# Altium PCB f103ret6_w25q64_20200910.PcbDoc
Units mm, origin at the board's own origin, x right, y up, seen from the top; angles counter-clockwise.
Board outline 50.16 x 15.89 mm, 2 copper layers (Top Layer, Bottom Layer); 41 components, 39 nets, 177 pads, 56 vias.
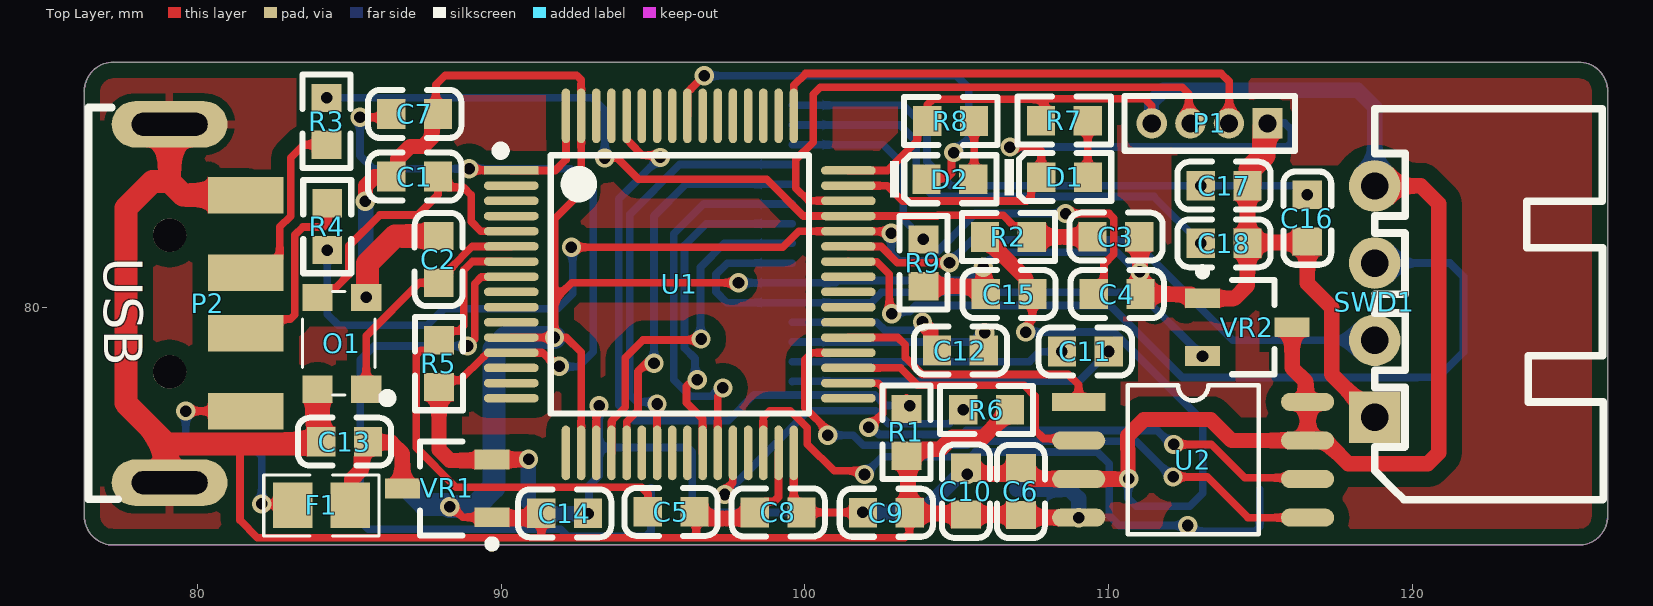
[diagram p0: Top Layer view]
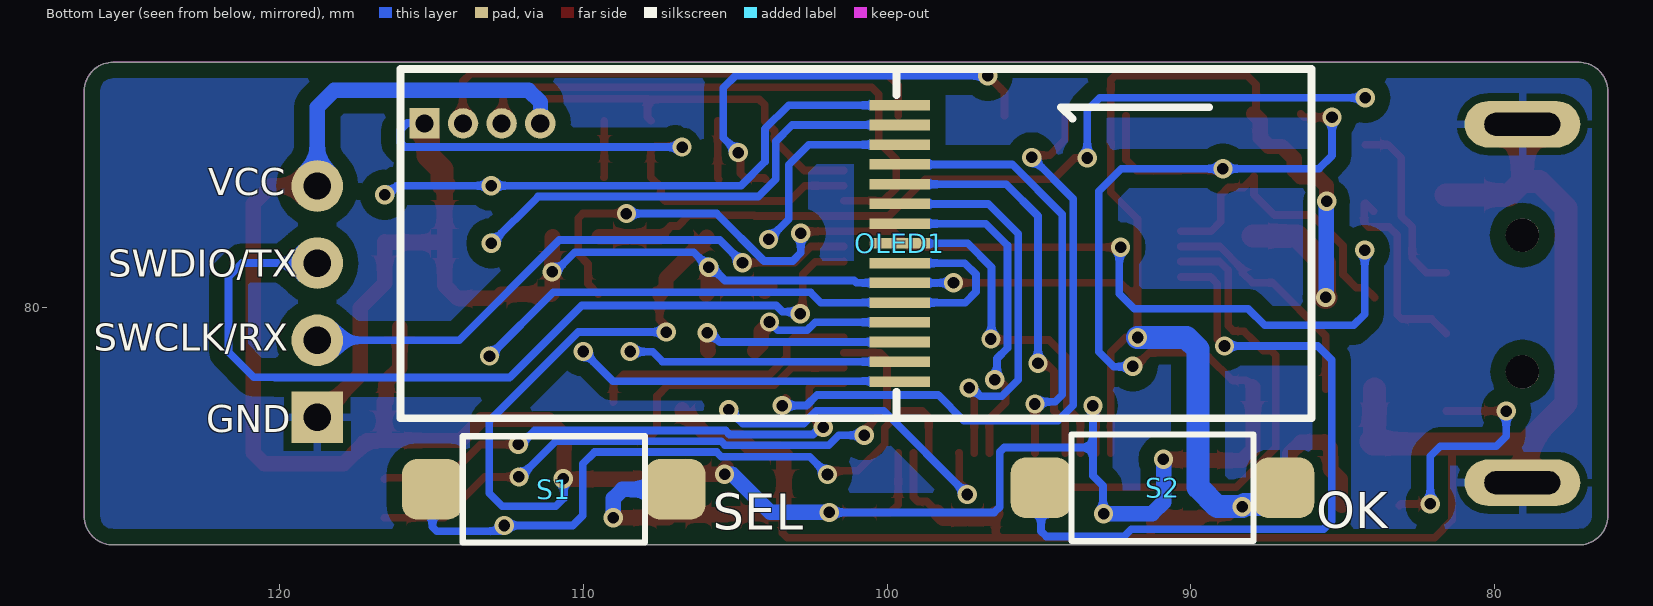
[diagram p1: Bottom Layer view, seen from below]
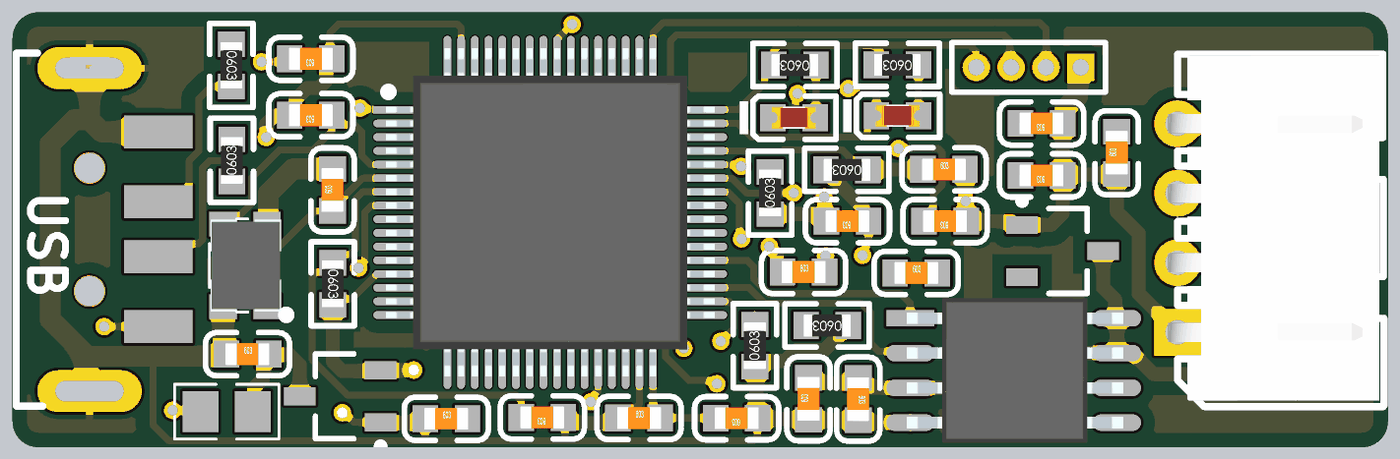
[diagram p2: 3D render of the assembled board from above, using the file's embedded part models]

## Layer stack, top to bottom
Top Solder: solder mask 0.0102, Solder Resist, Dk 3.5
Top Layer: signal copper 0.0356
Dielectric 1: dielectric 0.32, FR-4, Dk 4.8
Bottom Layer: signal copper 0.0356
Bottom Solder: solder mask 0.0102, Solder Resist, Dk 3.5

## Board outline
76.271,73.109 76.271,87.113 76.271,87.123 cw(c77.221,87.113) 77.229,88.062 77.221,88.062 125.486,88.062 125.477,88.062 cw(c125.486,87.116) 126.432,87.127 126.432,87.116 126.432,73.11 126.43,73.11 cw(c125.489,73.112) 125.472,72.171 125.472,72.17 77.229,72.17 cw(c77.221,73.12)

## Design rules (kind name [scope] priority, off if disabled: settings)
Clearance Goly [InPolygon] p1: gap=0.508 ignorepadtopadclearanceinfootprint=FALSE
Clearance [All] p2: gap=0.1 ignorepadtopadclearanceinfootprint=FALSE
ComponentClearance [All] p1: gap=0.1 collisioncheckmode=3 verticalgap=0 showdistances=FALSE
MinimumSolderMaskSliver [All] p1 off: minsoldermaskwidth=0.254
PolygonConnect [All] p1: connectstyle=Relief reliefconductorwidth=0.254 reliefentries=4 polygonreliefangle="90 Angle" airgapwidth=0.254
RoutingVias [All] p1: holewidth=0.711 width=1.27 viastyle="Through Hole" minholewidth=0.711 minwidth=1.27 maxholewidth=0.711 maxwidth=1.27
SilkToSilkClearance [All] p1 off: silktosilkclearance=0.254
SilkToSolderMaskClearance [IsPad] p1 off: minsilkscreentomaskgap=0.254 clearancetoexposedcopper=TRUE
SolderMaskExpansion [All] p1: expansion=0.102
Width [All] p1: maxlimit=0.762 minlimit=0.254 preferedwidth=0.254
26 further rules are at their usual default settings.

## Components (designator, comment, footprint, x,y, rotation, side; value= is the part's Value field where it differs from the comment)
C1 "22pF (220) 5% 50V" 0603_C 87.15,84.3 r180 top
C2 "22pF (220) 5% 50V" 0603_C 87.94,81.57 r90 top
C3 "22pF (220) 5% 50V" 0603_C 110.24,82.32 r0 top
C4 "22pF (220) 5% 50V" 0603_C 110.28,80.43 r180 top
C5 "100nF (104) 10% 50V" 0603_C 95.59,73.26 r180 top
C6 "100nF (104) 10% 50V" 0603_C 107.11,73.93 r270 top
C7 "100nF (104) 10% 50V" 0603_C 87.15,86.361 r180 top
C8 "100nF (104) 10% 50V" 0603_C 99.12,73.24 r0 top
C9 "100nF (104) 10% 50V" 0603_C 102.68,73.23 r180 top
C10 "100nF (104) 10% 50V" 0603_C 105.3,73.94 r90 top
C11 "1uF (105) 10% 50V" 0603_C 109.23,78.54 r0 top
C12 "1uF (105) 10% 50V" 0603_C 105.12,78.57 r0 top
C13 "1uF (105) 10% 50V" 0603_C 84.84,75.57 r0 top
C14 "1uF (105) 10% 50V" 0603_C 92.09,73.21 r0 top
C15 "1uF (105) 10% 50V" 0603_C 106.72,80.43 r180 top
C16 "4.7uF (475) 10% 16V" 0603_C 116.54,82.93 r90 top
C17 "100nF (104) 10% 50V" 0603_C 113.8,84 r180 top
C18 "2.2uF (225) 10% 16V" 0603_C 113.8,82.1 r180 top
D1 "白灯 0603" 0603_LED_S1 108.55,84.28 r0 top
D2 "白灯 0603" 0603_LED_S1 104.77,84.21 r0 top
F1 "500mA" 0805 83.13,73.47 r0 top
O1 "16MHZ" 3225 84.65,78.81 r90 top
OLED1 "QG-2832TLBFG02" 0.91-OLED 116.005,89.134 r180 bottom
P1 "MHDR1X4" MHDR1X4 115.23,86.05 r180 top
P2 "USB" USB_A/P_B 79.08,80.133 r270 top
R1 "10KΩ (1002) ±1%" 0603_R 103.34,75.88 r90 top
R2 "1.5KΩ (1501) ±1%" 0603_R 106.7,82.31 r180 top
R3 "22Ω (22R0) ±1%" 0603_R 84.25,86.12 r270 top
R4 "22Ω (22R0) ±1%" 0603_R 84.27,82.65 r90 top
R5 "10KΩ (1002) ±1%" 0603_R 87.95,78.14 r270 top
R6 "10KΩ (1002) ±1%" 0603_R 105.98,76.62 r180 top
R7 "1KΩ (1001) ±1%" 0603_R 108.54,86.14 r180 top
R8 "1KΩ (1001) ±1%" 0603_R 104.8,86.13 r180 top
R9 "2MΩ (2004) ±1%" 0603_R 103.902,81.46 r90 top
S1 "KEY" KEY 110.97,74 r0 bottom
S2 "KEY" KEY 90.93,74.05 r0 bottom
SWD1 "XH2.54*4" XH2.54-WI-4P 118.76,80.18 r90 top
U1 "STM32F103RET6" LQFP64 95.88,80.75 r270 top
U2 "W25Q64" SOP8_W 109.014,76.88 r0 top
VR1 "XC6206P332MR" SOT-23-3L 88.22,74.03 r0 top
VR2 "XC6206P332MR" SOT-23-3L 114.565,79.34 r180 top

## Footprints (in the part's own frame and the unit in brackets; to place one, negate y for a bottom-side part, rotate by r counter-clockwise, add the part's x,y. Pads: shape width x height; smd on the part's side, far side on the other; paste and mask are expansions set on the pad)
0.91-OLED [mm]
  rect 2x0.35 smd: 1(16.423,-11.585) 2(16.423,-10.933) 3(16.423,-10.283) 4(16.423,-9.633) 5(16.423,-8.985) 6(16.423,-8.335) 7(16.423,-7.685) 8(16.423,-7.035) 9(16.423,-6.385) 10(16.423,-5.735) 11(16.423,-5.085) 12(16.423,-4.435) 13(16.423,-3.785) 14(16.423,-3.135) 15(16.423,-2.485)
  silkscreen extent -0.02,-12.79 29.98,-1.29
0603_C [mm]
  rect 0.93x0.98 smd: 1(-0.77,0) 2(0.77,0)
  silkscreen extent -1.53,-0.79 1.54,0.79, body extent -0.8,-0.4 0.8,0.4, height 0.3
0603_LED_S1 [mm]
  rect 0.93x0.98 smd: A(0.77,0) K(-0.77,0)
  silkscreen extent -1.97,-0.79 1.54,0.79, body extent -0.8,-0.4 0.8,0.4, height 0.6
0603_R [mm]
  rect 0.93x0.98 smd: 1(-0.77,0) 2(0.77,0)
  silkscreen extent -1.53,-0.79 1.54,0.79, body extent -0.85,-0.4 0.85,0.4, height 0.56
0805 [mm]
  rect 1.3x1.5 smd: 1(0,0) 2(1.9,0)
  silkscreen extent -0.95,-1 2.85,1
3225 [mm]
  rect 0.9x1 smd: 1(-1.51,-0.905) 2(1.51,-0.905) 3(1.51,0.7) 4(-1.51,0.7)
  silkscreen extent -1.95,-1.75 1.7,1.2, body extent -1.68,-1.41 2.67,1.15, height 0.7
KEY [mm]
  rrect50% 2x2 smd: 1(-4,0) 2(4,0)
  silkscreen extent -3,-1.75 3,1.75, body extent -4.5,-1.75 4.5,1.75, height 4.5
LQFP64 [mm]
  rect 0.28x1.8 smd mask+0.051: 1(-3.75,-5.55)
  oval 0.28x1.8 smd mask+0.051: 2(-3.25,-5.55) 3(-2.75,-5.55) 4(-2.25,-5.55) 5(-1.75,-5.55) 6(-1.25,-5.55) 7(-0.75,-5.55) 8(-0.25,-5.55) 9(0.25,-5.55) 10(0.75,-5.55) 11(1.25,-5.55) 12(1.75,-5.55) 13(2.25,-5.55) 14(2.75,-5.55) 15(3.25,-5.55) 16(3.75,-5.55) 33(3.75,5.55) 34(3.25,5.55) 35(2.75,5.55) 36(2.25,5.55) 37(1.75,5.55) 38(1.25,5.55) 39(0.75,5.55) 40(0.25,5.55) 41(-0.25,5.55) 42(-0.75,5.55) 43(-1.25,5.55) 44(-1.75,5.55) 45(-2.25,5.55) 46(-2.75,5.55) 47(-3.25,5.55) 48(-3.75,5.55)
  oval 1.8x0.28 smd mask+0.051: 17(5.55,-3.75) 18(5.55,-3.25) 19(5.55,-2.75) 20(5.55,-2.25) 21(5.55,-1.75) 22(5.55,-1.25) 23(5.55,-0.75) 24(5.55,-0.25) 25(5.55,0.25) 26(5.55,0.75) 27(5.55,1.25) 28(5.55,1.75) 29(5.55,2.25) 30(5.55,2.75) 31(5.55,3.25) 32(5.55,3.75) 49(-5.55,3.75) 50(-5.55,3.25) 51(-5.55,2.75) 52(-5.55,2.25) 53(-5.55,1.75) 54(-5.55,1.25) 55(-5.55,0.75) 56(-5.55,0.25) 57(-5.55,-0.25) 58(-5.55,-0.75) 59(-5.55,-1.25) 60(-5.55,-1.75) 61(-5.55,-2.25) 62(-5.55,-2.75) 63(-5.55,-3.25) 64(-5.55,-3.75)
  silkscreen extent -4.55,-6.05 4.25,4.25, body extent -6,-6 6,6, height 1.6
MHDR1X4 [mm] "Connector; Header; 4 Position"
  rect 1x1 hole 0.6: 1(0,0)
  round 1 hole 0.6: 2(1.27,0) 3(2.54,0) 4(3.81,0)
  silkscreen extent -0.9,-0.9 4.71,0.9
SOP8_W [mm]
  rect 1.75x0.6 smd: 1(0,0)
  oval 1.75x0.6 smd: 2(0,-1.27) 3(0,-2.54) 4(0,-3.81) 5(7.536,-3.81) 6(7.536,-2.54) 7(7.536,-1.27) 8(7.536,0)
  silkscreen extent 1.61,-4.36 5.93,0.55, body extent -0.14,-4.54 7.76,0.74, height 2.16
SOT-23-3L [mm] "http://www.aosmd.com/res/packaging_information/SOT-23-3L.pdf"
  rect 1.15x0.65 smd: 1(1.475,-0.95) 2(1.475,0.95) 3(-1.475,0)
  silkscreen extent -0.9,-1.95 1.6,1.55, body extent -0.9,-1.55 0.9,1.55, height 1.25
USB_A/P_B [mm] "A型USB 插头，20*13*4.5mm"
  round 1.1 hole 1.1: 0(-2.237,0) 0(2.263,0)
  rect 1.2x2.5 smd: 1(3.556,2.508) 2(1,2.508) 3(-1,2.508) 4(-3.556,2.508)
  oval 1.524x3.81 hole 0.762 slot 2.5 at 90 deg: 4(-5.887,0) 4(5.913,0)
  silkscreen extent -6.44,-2.67 6.46,-1.7, body extent -6.46,-17.9 6.49,2.7, height 3.25
XH2.54-WI-4P [mm] "接插件，4P"
  rect 1.7x1.7 hole 0.9: 1(-3.81,0)
  round 1.7 hole 0.9: 2(-1.27,0) 3(1.27,0) 4(3.81,0)
  silkscreen extent -6.53,-7.53 6.35,0, body extent -6.31,-7.35 6.31,0.35, height 5.73

## Part data
C1 C2 C3 C4: library part "0603 22pF (220) 5% 50V", "贴片电容", Package=0603, SuppliersPartNumber=C1653, ComponentLink1Description=供应, ComponentLink1URL=http://www.szlcsc.com/product/details_2005.html, Supplier=LC
C5 C6 C7 C8 C9 C10 C17: library part "0603 100nF (104) 10% 50V", "贴片电容", Package=0603, SuppliersPartNumber=C14663, ComponentLink1Description=供应, ComponentLink1URL=http://www.szlcsc.com/product/details_15331.html, Supplier=LC
C11 C12 C13 C14 C15: library part "0603 1uF (105) 10% 50V", "贴片电容", Package=0603, SuppliersPartNumber=C15849, ComponentLink1Description=供应, ComponentLink1URL=http://www.szlcsc.com/product/details_16531.html, Supplier=LC
C16: library part "0603 4.7uF (475) 10% 16V", "贴片电容", Package=0603, SuppliersPartNumber=C19666, ComponentLink1Description=供应, ComponentLink1URL=http://www.szlcsc.com/product/details_20375.html, Supplier=LC
C18: library part "0603 2.2uF (225) 10% 16V", "贴片电容", Package=0603, SuppliersPartNumber=C23630, ComponentLink1Description=供应, ComponentLink1URL=http://www.szlcsc.com/product/details_24366.html, Supplier=LC
D1 D2: library part "0603 白灯", "发光二极管", Package=0603, SuppliersPartNumber=C2290, ComponentLink1Description=供应, ComponentLink1URL=http://www.szlcsc.com/product/details_2663.html, Supplier=LC
F1: library part FUSE, "保险丝，熔断丝"
O1: library part OSC, "OSC"
OLED1: library part 0.91-OLED, BOM_Manufacturer=Allvision, BOM_Manufacturer Part=QG-2832TLBFG02, BOM_Supplier=LCSC, BOM_Supplier Part=C91220, Contributor=LCSC, spicePre=O, spiceSymbolName=QG-2832TLBFG02
P1: "Header, 4-Pin", LatestRevisionDate=17-Jul-2002, LatestRevisionNote="Re-released for DXP Platform.", Publisher="Altium Limited"
P2: library part 1470695-2, "USB 1.1, Right Angle, SMT, A Type, Plug, 4 Position, Natural", PackageDocument=21-Jan-2003, ComponentLink1Description="Manufacturer Link", ComponentLink1URL=http://www.tycoelectronics.com/, ComponentLink2Description="Packaging Specification", ComponentLink2URL=http://ecommas.tycoelectronics.com/commerce/DocumentDelivery/DDEController?Action=showdoc&DocId=Customer+Drawing%7F1470695%7FO%7Fpdf%7FEnglish%7FC_1470695_O.pdf, ContactMaterial=Brass, ContactPlating="Gold (30) over Nickel (50)", DatasheetDocument=21-Jan-2003, DrillSize="Corresponds to nominal value.", HousingMaterial=Thermoplastic, PackageReference=1470695A, PanelGround=Without, PCB_Layout="Complies with manufacturer's recommendation.", Published=15-Jul-2004, Publisher="Altium Limited"
R1 R5 R6: library part "0603 10KΩ (1002) 1%", "贴片电阻", Package=0603, SuppliersPartNumber=C25804, ComponentLink1Description=供应, ComponentLink1URL=http://www.szlcsc.com/product/details_26547.html, Supplier=LC
R2: library part "0603 1.5KΩ (1501) 1%", "贴片电阻", Package=0603, SuppliersPartNumber=C22843, ComponentLink1Description=供应, ComponentLink1URL=http://www.szlcsc.com/product/details_23570.html, Supplier=LC
R3 R4: library part "0603 22Ω (22R0) 1%", "贴片电阻", Package=0603, SuppliersPartNumber=C23345, ComponentLink1Description=供应, ComponentLink1URL=http://www.szlcsc.com/product/details_24078.html, Supplier=LC
R7 R8: library part "0603 1KΩ (1001) 1%", "贴片电阻", Package=0603, SuppliersPartNumber=C21190, ComponentLink1Description=供应, ComponentLink1URL=http://www.szlcsc.com/product/details_21904.html, Supplier=LC
R9: library part "0603 2MΩ (2004) 1%", "贴片电阻", Package=0603, SuppliersPartNumber=C22976, ComponentLink1Description=供应, ComponentLink1URL=http://www.szlcsc.com/product/details_23703.html, Supplier=LC
SWD1: library part "Header 4", "Header, 4-Pin", LatestRevisionDate=17-Jul-2002, LatestRevisionNote="Re-released for DXP Platform.", Publisher="Altium Limited"
U1: library part STM32F103RxT6, "STM32F103RxT6"
U2: library part W25Q, "W25Q"
VR1 VR2: library part "SOT-23 XC6206P332MR", "低压差线性稳压(LDO)", Package=SOT-23, SuppliersPartNumber=C5446, ComponentLink1Description=供应, ComponentLink1URL=http://www.szlcsc.com/product/details_5896.html, Supplier=LC

## Via types
v1: diameter 0.635, hole 0.381, Top Layer to Bottom Layer, 56 vias

## Nets (pads, with @x,y where several pads share a name; then routed paths per layer and width w, separated by ;. In a path a pad name is that pad's centre, name@x,y a point inside that pad or via, vN(x,y) a via of type N, cw(c..) or ccw(c..) an arc to the next point about the centre after c; other vN are vias at no path point)
3V3: C6.1 C7.2 C8.2 C9.2 C10.2 C14.2 C15.1 P1.4 R2.2 R5.2 R7.2 R8.2 SWD1.4 U1.1 U1.13 U1.19 U1.32 U1.48 U1.64 U2.3 U2.7 U2.8 VR1.2 VR2.3 | length 133
  Top Layer w0.254: v1(85.35,86.25) 86.269,86.25 C7.2 ; R5.2 88.169,77.589 88.64,77.589 89.418,78.367 89.43,78.367 89.563,78.5 U1.13 90.335,78.495 91.367,78.495 91.812,78.05 v1(91.91,78.05) ; v1(88.94,84.56) 88.987,84.513 90.317,84.513 U1.1 91.78,84.5 92.13,84.85 U1.64 ; C14.2 C14.2@92.89,73.24 ; U1.19@93.125,75.195 U1.19 93.13,76.66 v1(93.22,76.75) ; U1.32 99.63,73.5 C8.2 v1(101.9,73.24) C9.2 ; U1.48 102.721,84.5 103.7,85.479 103.7,85.8 R8.2 104.03,86.66 104.217,86.847 107.887,86.847 ; v1(107.27,79.18) 107.27,79.37 107.49,79.59 C15.1 C15.1@107.62,80.56 ; R7.2 107.887,86.257 107.887,86.847 ; P1.4 111.42,86.63 111.193,86.857 107.887,86.857 107.887,86.847
  Top Layer w0.508: R5.2 87.95,75.31 88.31,74.95 89.665,74.95 VR1.2 90.89,74.98 v1(90.9,74.99) ; C10.2 105.35,74.66 v1(105.35,74.5) 106.9,74.5 107.105,74.705 C6.1 107.135,74.7 107.495,74.34 U2.3 110.65,74.34 v1(110.66,74.35) 110.636,74.374 110.636,75.323 110.62,75.339 110.62,75.76 111.16,76.3 113.36,76.3 114.05,75.61 U2.7 ; R2.2 105.93,82.285 107.279,80.936 107.279,80.641 C15.1 ; VR2.3 116.04,78 116.49,77.55 116.49,76.922 116.532,76.88 U2.8 U2.7 ; SWD1.4 120.28,83.99 120.87,83.4 120.87,75.21 120.5,74.84 117.895,74.84 117.125,75.61 U2.7
  Bottom Layer w0.254: v1(85.35,86.25) 85.35,84.99 85.78,84.56 v1(88.94,84.56) 92.29,84.56 93.03,83.82 93.03,78.53 92.54,78.04 91.92,78.04 v1(91.91,78.05) ; v1(92.87,73.2) 92.89,73.22 92.89,74.12 93.22,74.45 93.22,75.38 ; v1(93.22,76.75) 93.22,75.38 ; v1(101.9,73.24) 96.47,73.24 96.29,73.42 96.29,75.231 96.141,75.38 93.22,75.38 ; v1(107.27,79.18) 110.17,79.18 113.1,76.25 113.1,73.87 112.67,73.44 110.91,73.44 110.64,73.71 110.64,74.33 v1(110.66,74.35)
  Bottom Layer w0.508: v1(90.9,74.99) 90.89,74.98 90.89,73.58 91.27,73.2 v1(92.87,73.2) ; v1(101.9,73.24) 103.84,73.24 105.1,74.5 v1(105.35,74.5) ; P1.4 111.41,86.06 111.41,86.75 111.8,87.14 118.21,87.14 118.76,86.59 SWD1.4
5V: C13.2 F1.2 VR1.3 | length 4.8
  Top Layer w0.508: F1.2 85.08,73.52 85.08,74.332 85.399,74.651 85.399,75.359 C13.2 85.63,75.55 86.372,75.55 86.745,75.177 VR1.3
FLASH_CS: U1.37 U2.1 | length 9
  Top Layer w0.254: U1.37 103.06,79 103.3,78.76 103.3,78.344 103.863,77.781 108.669,77.781 109.01,77.44 109.01,76.884 U2.1
FLASH_MISO: U1.35 U2.2 | length 9.2
  Top Layer w0.254: U1.35 103.143,78 103.716,77.427 107.219,77.427 107.572,77.074 107.572,75.958 107.854,75.676 108.948,75.676 U2.2
FLASH_MOSI: U1.36 U2.5 | length 21.4
  Top Layer w0.254: v1(100.75,75.785) 100.75,75.94 100,76.69 100,78.27 100.23,78.5 U1.36 ; v1(112.12,74.41) 113.25,74.41 114.59,73.07 U2.5
  Bottom Layer w0.254: v1(100.75,75.785) 101.585,75.785 101.918,75.452 105.333,75.452 105.462,75.581 110.909,75.581 112.08,74.41 v1(112.12,74.41)
FLASH_SCK: U1.34 U2.6 | length 17.9
  Top Layer w0.254: U1.34 101.435,77.495 102.408,77.495 102.557,77.346 102.557,76.497 v1(102.1,76.04) ; v1(112.14,75.48) 113.38,75.48 114.48,74.38 116.51,74.38 U2.6
  Bottom Layer w0.254: v1(102.1,76.04) 102.203,76.04 102.437,75.806 105.186,75.806 105.315,75.935 111.607,75.935 112.062,75.48 v1(112.14,75.48)
GND: C1.2 C2.2 C3.2 C4.1 C5.1 C6.2 C7.1 C8.1 C9.1 C10.1 C13.1 C14.1 C15.2 C16.1 C17.1 C18.1 D1.K O1.2 O1.4 OLED1.6 P1.1 P2.4 R1.1 R6.1 R9.1 S1.1 S2.1 SWD1.1 U1.12 U1.18 U1.31 U1.47 U1.63 U2.4 VR1.1 VR2.1 | length 177.7
  Top Layer w0.254: 81.49,75.496 81.4,75.406 81.4,72.98 81.971,72.409 91.35,72.409 ; C7.1 87.85,86.431 87.85,87.32 88.16,87.63 92.48,87.63 92.63,87.48 U1.63 92.63,83.78 91.75,82.9 91.75,80.23 ; v1(88.3,73.43) 88.389,73.43 88.739,73.08 VR1.1 ; U1.12 v1(91.75,79) ; C14.1 91.32,72.439 91.35,72.409 ; U1.18 92.63,78.51 92.14,79 v1(91.75,79) ; C5.1 96.42,73.2 96.42,72.558 96.271,72.409 ; v1(97.811,80.799) 92.319,80.799 91.75,80.23 ; 98.119,72.409 96.271,72.409 ; 98.12,72.41 103.29,72.41 103.44,72.56 103.44,73.22 C9.1 ; C8.1 98.35,73.262 98.688,73.6 98.981,73.6 99.13,73.749 U1.31 ; U1.47 101.431,83.999 102.711,83.999 103.217,83.493 107.293,83.493 107.442,83.642 107.442,83.942 D1.K 107.78,85.151 107.631,85.3 106.78,85.3 v1(106.75,85.27) ; 91.35,72.409 96.271,72.409 ; v1(91.75,79) 91.75,80.23
  Top Layer w0.508: v1(85.52,83.49) 85.53,83.5 85.53,83.992 85.828,84.29 86.37,84.29 C1.2 86.591,84.511 86.591,84.881 87,85.29 87.43,85.29 87.709,85.569 87.709,86.15 C7.1 ; VR1.1 89.725,73.05 91.16,73.05 C14.1 ; C5.1@96.42,73.2 96.58,73.04 98.15,73.04 C8.1 ; R9.1@103.862,80.69 R9.1@104.022,80.53 ; R9.1 105.715,80.69 C15.2@105.894,80.511 ; v1(105.87,81.31) 105.894,81.286 C15.2@105.894,80.511 ; C15.2@105.894,80.486 C15.2 105.95,80.455 C15.2@105.894,80.511 ; R6.1 106.75,76.595 105.875,75.72 104.854,75.72 104.455,75.321 103.551,75.321 R1.1 103.395,75.055 103.395,73.285 C9.1 103.48,73.2 105.27,73.2 C10.1 105.305,73.165 107.105,73.165 C6.2 107.2,73.07 v1(109.014,73.07) ; C3.2 111.03,82.3 111.03,80.45 C4.1 112.7,80.43 112.84,80.29 VR2.1 114.14,80.29 114.57,80.72 C18.1 ; C17.1 C18.1 ; SWD1.1 117.34,77.79 117.34,79.984 116.54,80.784 C16.1 116.51,82.13 114.6,82.13 C18.1
  Top Layer w0.762: P2.4@79.08,74.22 78.96,74.34 78.96,75.52 ; P2.4@79.08,86.02 79.08,84.136 ; P2.4@81.588,83.689 79.526,83.689 79.08,84.136 ; O1.4 83.95,75.715 84.07,75.595 C13.1 83.996,75.496 81.49,75.496 78.984,75.496 78.96,75.52 ; v1(85.555,80.32) 85.595,80.36 85.595,81.435 86.5,82.34 C2.2 ; C17.1 114.654,84.084 114.654,84.534 115.111,84.991 115.111,85.931 P1.1 ; 78.96,75.52 77.64,76.84 77.64,83.26 78.516,84.136 79.08,84.136
  Bottom Layer w0.254: v1(97.811,80.799) OLED1.6 101.009,80.799 101.088,80.878 105.335,80.878 105.767,81.31 v1(105.87,81.31) 106.37,81.81 110.277,81.81 110.927,81.16 v1(111.03,81.16) ; v1(106.75,85.27) 115.871,85.27 116.02,85.419 116.02,85.84 115.8,86.06 115.24,86.06 P1.1
  Bottom Layer w0.508: v1(85.52,83.49) 85.538,83.472 85.538,80.338 v1(85.555,80.32) ; S1.1 108.716,74 109.014,73.702 v1(109.014,73.07)
  Bottom Layer w0.762: S2.1 87.476,73.504 88.226,73.504 v1(88.3,73.43) 89.12,73.43 89.76,74.07 89.76,78.62 90.14,79 v1(91.75,79)
KEY1: S2.2 U1.8 | length 23.8
  Top Layer w0.254: v1(88.89,78.72) 89.124,78.954 89.124,80.77 89.349,80.995 90.325,80.995 U1.8
  Bottom Layer w0.254: v1(88.89,78.72) 85.82,78.72 85.36,78.26 85.36,72.958 85.628,72.69 91.955,72.69 92.195,72.45 94.76,72.45 94.93,72.62 S2.2
KEY2: S1.2 U1.30 | length 22.3
  Top Layer w0.254: U1.30 98.63,76.37 98.85,76.59 99.519,76.59 100.08,76.029 100.08,75.49 100.96,74.61 v1@101.85,74.61
  Bottom Layer w0.254: v1(101.96,74.49) 102.543,75.073 105.455,75.073 105.609,75.227 108.622,75.227 ; 108.64,75.227 109.633,75.227 110.02,74.84 110.02,73.14 110.35,72.81 v1(112.6,72.81) 112.79,72.62 114.821,72.62 114.97,72.769 S1.2
LED: D2.K U1.56 | length 14.4
  Top Layer w0.254: U1.56 96.13,87.067 96.263,87.2 96.263,87.212 96.671,87.62 v1(96.68,87.62) ; D2.K 104.04,84.25 104.67,84.25 104.827,84.407 104.827,85.017 v1(104.9,85.09)
  Bottom Layer w0.254: v1(96.68,87.62) 104.99,87.62 105.39,87.22 105.39,85.58 v1(104.9,85.09)
NetC1_1: C1.1 O1.3 U1.5 | length 10.2
  Top Layer w0.254: O1.3 84.273,80.643 84.553,80.643 84.987,81.077 84.987,82.017 86.002,83.032 87.242,83.032 87.92,83.71 C1.1@87.92,84.278 ; C1.1 C1.1@87.92,84.278 ; U1.5 89.33,82.5 89.01,82.82 89.01,83.69 88.76,83.94 88.258,83.94 C1.1@87.92,84.278
NetC2_1: C2.1 O1.1 U1.6 | length 7.8
  Top Layer w0.254: O1.1 85.555,79.049 87.306,80.8 C2.1 87.965,80.8 88.303,81.138 88.303,81.254 89.049,82 U1.6
NetC3_1: C3.1 R2.1 R3.1 U1.45 | length 28.1
  Top Layer w0.254: v1(93.41,84.91) 93.818,84.91 94.518,84.21 98.74,84.21 99.95,83 U1.45 104.347,83 104.374,83.027 106.525,83.027 106.879,82.673 107.132,82.673 107.132,82.648 R2.1
  Top Layer w0.508: R2.1 107.475,82.315 109.465,82.315 C3.1
  Bottom Layer w0.254: v1(84.25,86.89) 93,86.89 93.41,86.48 v1(93.41,84.91)
NetC4_2: C4.2 R4.1 U1.44 | length 34.7
  Top Layer w0.254: v1(92.31,81.97) 99.27,81.97 99.8,82.5 U1.44 101.435,82.495 102.775,82.495 v1(102.84,82.43) ; v1(108.58,83.08) 110.021,83.08 110.17,82.931 110.17,81.744 109.848,81.422 109.848,80.768 C4.2
  Bottom Layer w0.254: v1(84.27,81.88) 84.27,79.77 84.64,79.4 87.565,79.4 88.115,79.95 91.86,79.95 92.35,80.44 92.35,81.93 v1(92.31,81.97) ; v1(102.84,82.43) 102.84,81.789 103.109,81.52 104.05,81.52 105.61,83.08 v1(108.58,83.08)
NetC11_1: C11.1 OLED1.2 | length 9
  Bottom Layer w0.254: OLED1.2 107.391,78.201 107.72,78.53 108.45,78.53 v1(108.46,78.54)
NetC11_2: C11.2 OLED1.1 | length 10.8
  Bottom Layer w0.254: OLED1.1 99.597,77.564 109.024,77.564 v1(110,78.54)
NetC12_1: C12.1 OLED1.4 | length 5.7
  Top Layer w0.508: v1(103.87,79.51) 103.87,79.475 104.139,79.206 104.139,78.781 C12.1
  Bottom Layer w0.254: OLED1.4 99.586,79.505 102.365,79.505 102.634,79.236 103.595,79.236 v1(103.87,79.51)
NetC12_2: C12.2 OLED1.3 | length 7.1
  Top Layer w0.508: C12.2 105.905,78.585 105.905,79.145 v1(105.92,79.16)
  Bottom Layer w0.254: OLED1.3 105.508,78.851 105.817,79.16 v1(105.92,79.16)
NetC16_2: C16.2 C17.2 OLED1.15 | length 18.8
  Bottom Layer w0.254: OLED1.15 103.241,86.649 104.022,85.868 104.022,84.788 104.809,84 v1(113.03,84) 116.137,84 116.437,83.7 v1(116.54,83.7)
NetC18_2: C18.2 OLED1.14 | length 15.8
  Bottom Layer w0.254: OLED1.14 103.121,85.999 103.668,85.452 103.668,84.217 104.245,83.64 111.49,83.64 v1(113.03,82.1)
NetD1_A: D1.A R7.1 | length 1.9
  Top Layer w0.254: R7.1 109.31,84.29 D1.A
NetD2_A: D2.A R8.1 | length 1.9
  Top Layer w0.254: D2.A 105.57,84.24 R8.1
NetF1_1: F1.1 P2.1 | length 8.2
  Top Layer w0.254: v1(79.613,76.577) P2.1 ; v1(82.11,73.52) 83.08,73.52 F1.1
  Bottom Layer w0.254: v1(79.613,76.577) 79.613,75.747 79.94,75.42 81.78,75.42 82.11,75.09 v1(82.11,73.52)
NetOLED1_13: OLED1.13 R9.2 | length 6.7
  Bottom Layer w0.254: OLED1.13 102.581,85.349 103.24,84.69 103.24,82.892 v1(103.902,82.23)
NetP1_2: P1.2 U1.49 | length 17
  Top Layer w0.254: U1.49 99.635,86.305 99.635,87.305 100.02,87.69 113.71,87.69 113.97,87.43 113.97,86.06 P1.2
NetP1_3: P1.3 U1.46 | length 18.8
  Top Layer w0.254: U1.46 100.12,83.5 99.7,83.92 99.7,84.86 100.27,85.43 100.27,87.01 100.5,87.24 112.42,87.24 112.64,87.02 112.64,86.1 P1.3
NetR1_2: R1.2 U1.60 | length 21.8
  Top Layer w0.254: U1.60 94.13,85.533 94.263,85.4 94.263,85.388 94.648,85.003 95.167,85.003 v1(95.24,84.93) ; R1.2 R1.2@103.34,76.91 ; v1(103.45,76.76) 103.45,76.8 R1.2@103.34,76.91 ; R1.2@103.34,76.91 103.29,76.96 103.34,77.01 R1.2@103.34,76.91
  Bottom Layer w0.254: v1(95.24,84.93) 93.87,83.56 93.87,76.77 94.375,76.265 97.475,76.265 98.32,77.11 102.301,77.11 102.651,76.76 v1(103.45,76.76)
NetR6_2: R6.2 U1.28 | length 10.8
  Top Layer w0.254: v1(97.36,73.83) 97.36,73.96 97.625,74.225 97.625,75.195 U1.28
  Bottom Layer w0.254: v1(97.36,73.83) 100.115,76.585 102.326,76.585 102.75,76.16 104.75,76.16 v1(105.21,76.62)
NRST: C5.2 R5.1 U1.7 | length 17.4
  Top Layer w0.254: U1.7 89.05,81.5 88.77,81.22 88.77,79.39 88.59,79.21 88.25,79.21 R5.1 87.612,78.572 87.352,78.572 87.2,78.42 87.2,75.38 88.507,74.073 94.617,74.073 94.83,73.86 94.83,73.27 C5.2
OLED_CLK: OLED1.11 U1.21 | length 13.3
  Top Layer w0.254: U1.21 94.135,75.205 94.135,76.225 94.5,76.59 94.5,77.88 94.77,78.15 v1(95.03,78.15)
  Bottom Layer w0.254: v1(95.03,78.15) 95.03,83 96.079,84.049 OLED1.11
OLED_CS: OLED1.8 U1.20 | length 11.8
  Top Layer w0.254: U1.20 93.635,75.205 93.635,76.255 94.08,76.7 94.08,78.33 94.67,78.92 96.55,78.92 v1(96.58,78.95)
  Bottom Layer w0.254: v1(96.58,78.95) 96.56,78.97 96.56,81.31 97.349,82.099 OLED1.8
OLED_DC: OLED1.10 U1.27 | length 13.3
  Top Layer w0.254: U1.27@97.125,75.205 U1.27 97.13,77.067 97.3,77.237 v1(97.3,77.34)
  Bottom Layer w0.254: v1(97.3,77.34) 97.197,77.34 96.922,77.065 96.224,77.065 95.682,77.608 95.682,82.412 96.669,83.399 OLED1.10
OLED_MOSI: OLED1.12 U1.23 | length 14.6
  Top Layer w0.254: U1.23 v1(95.13,76.81)
  Bottom Layer w0.254: v1(95.13,76.81) 95.057,76.883 94.467,76.883 94.23,77.12 94.23,83.05 95.879,84.699 OLED1.12
OLED_RES: OLED1.9 U1.26 | length 11.3
  Top Layer w0.254: v1(96.45,77.61) 96.32,77.61 96.1,77.39 96.1,76.85 96.625,76.325 96.625,75.205 U1.26
  Bottom Layer w0.254: v1(96.45,77.61) 96.379,77.681 96.379,78.308 96.036,78.652 96.036,82.036 96.749,82.749 OLED1.9
OLED_VCC: OLED1.5 OLED1.7 VR2.2 | length 20.4
  Bottom Layer w0.254: OLED1.7 97.439,81.449 97.07,81.08 97.07,80.51 97.431,80.149 OLED1.5 102.179,80.149 102.522,80.492 110.988,80.492 v1(113.09,78.39)
OUT_SWCLK: SWD1.2 U1.43 | length 19.2
  Top Layer w0.254: U1.43 101.435,81.995 102.509,81.995 103.044,81.46 v1(104.76,81.46)
  Bottom Layer w0.254: v1(104.76,81.46) 105.51,82.21 110.79,82.21 114.09,78.91 SWD1.2
OUT_SWDIO: SWD1.3 U1.42 | length 28.7
  Top Layer w0.254: U1.42 101.435,81.495 102.365,81.495 102.773,81.087 102.773,79.867 v1(102.86,79.78)
  Bottom Layer w0.254: v1(102.86,79.78) 102.933,79.853 103.443,79.853 103.644,80.054 110.056,80.054 112.43,77.68 120.15,77.68 120.16,77.69 120.85,77.69 121.68,78.52 121.68,81.01 121.24,81.45 SWD1.3
USB_DM: P2.2 R4.2 | length 6.8
  Top Layer w0.254: P2.2 82.061,79.606 83.051,79.606 83.2,79.755 83.2,82.375 83.461,82.636 84.141,82.636 84.29,82.785 84.29,83.4 R4.2 84.245,83.42 R4.2@83.984,83.159
USB_DP: P2.3 R3.2 | length 6.1
  Top Layer w0.254: P2.3 82.238,81.133 82.711,81.606 82.711,82.641 83.065,82.995 83.065,84.915 83.5,85.35 R3.2
pads on no net: P2.0 U1.2 U1.3 U1.4 U1.9 U1.10 U1.11 U1.14 U1.15 U1.16 U1.17 U1.22 U1.24 U1.25 U1.29 U1.33 U1.38 U1.39 U1.40 U1.41 U1.50 U1.51 U1.52 U1.53 U1.54 U1.55 U1.57 U1.58 U1.59 U1.61 U1.62

## Polygon pours and split planes (outlines as drawn)
GND on Top Layer "Top Layer-GND" (solid, pour order 0): 76.271,73.109 76.271,87.113 76.271,87.123 cw(c77.221,87.113) 77.229,88.062 77.221,88.062 125.486,88.062 125.477,88.062 cw(c125.486,87.116) 126.432,87.127 126.432,87.116 126.432,73.11 126.43,73.11 cw(c125.489,73.112) 125.472,72.171 125.472,72.17 77.229,72.17 cw(c77.221,73.12)
GND on Bottom Layer "Bottom Layer-GND" (solid, pour order 1): 76.271,73.109 76.271,87.113 76.271,87.123 cw(c77.221,87.113) 77.229,88.062 77.221,88.062 125.486,88.062 125.477,88.062 cw(c125.486,87.116) 126.432,87.127 126.432,87.116 126.432,73.11 126.43,73.11 cw(c125.489,73.112) 125.472,72.171 125.472,72.17 77.229,72.17 cw(c77.221,73.12)

## Keep-outs
Keep-Out Layer:
  lines w0.025: 76.271,73.109 ccw(c77.221,73.12) 77.229,72.17 125.472,72.17 125.472,72.171 ccw(c125.489,73.112) 126.43,73.11 126.432,73.11 126.432,87.116 126.432,87.127 ccw(c125.486,87.116) 125.477,88.062 125.486,88.062 77.221,88.062 77.229,88.062 ccw(c77.221,87.113) 76.271,87.123 76.271,87.113 76.271,73.109

## Silkscreen, mask and mechanical layers (free items; w line width, h text height)
Bottom Overlay:
  text "VCC" at 122.353,83.39 h1.52
  text "SWDIO/TX" at 125.64,80.71 h1.52
  text "SWCLK/RX" at 126.12,78.26 h1.52
  text "GND" at 122.423,75.58 h1.52
  text "OK" at 85.86,72.32 h2.03
  text "SEL" at 105.74,72.27 h2.03